# Altium PCB Farmbot_Rpi_ext.pcbdoc
Units mil, origin at the board's own origin, x right, y up, seen from the top; angles counter-clockwise.
Board outline 2654.45 x 2547.24 mil, 2 copper layers (Top Layer, Bottom Layer), stack 2.757 mil thick; 32 components, 33 nets, 133 pads, 0 vias.
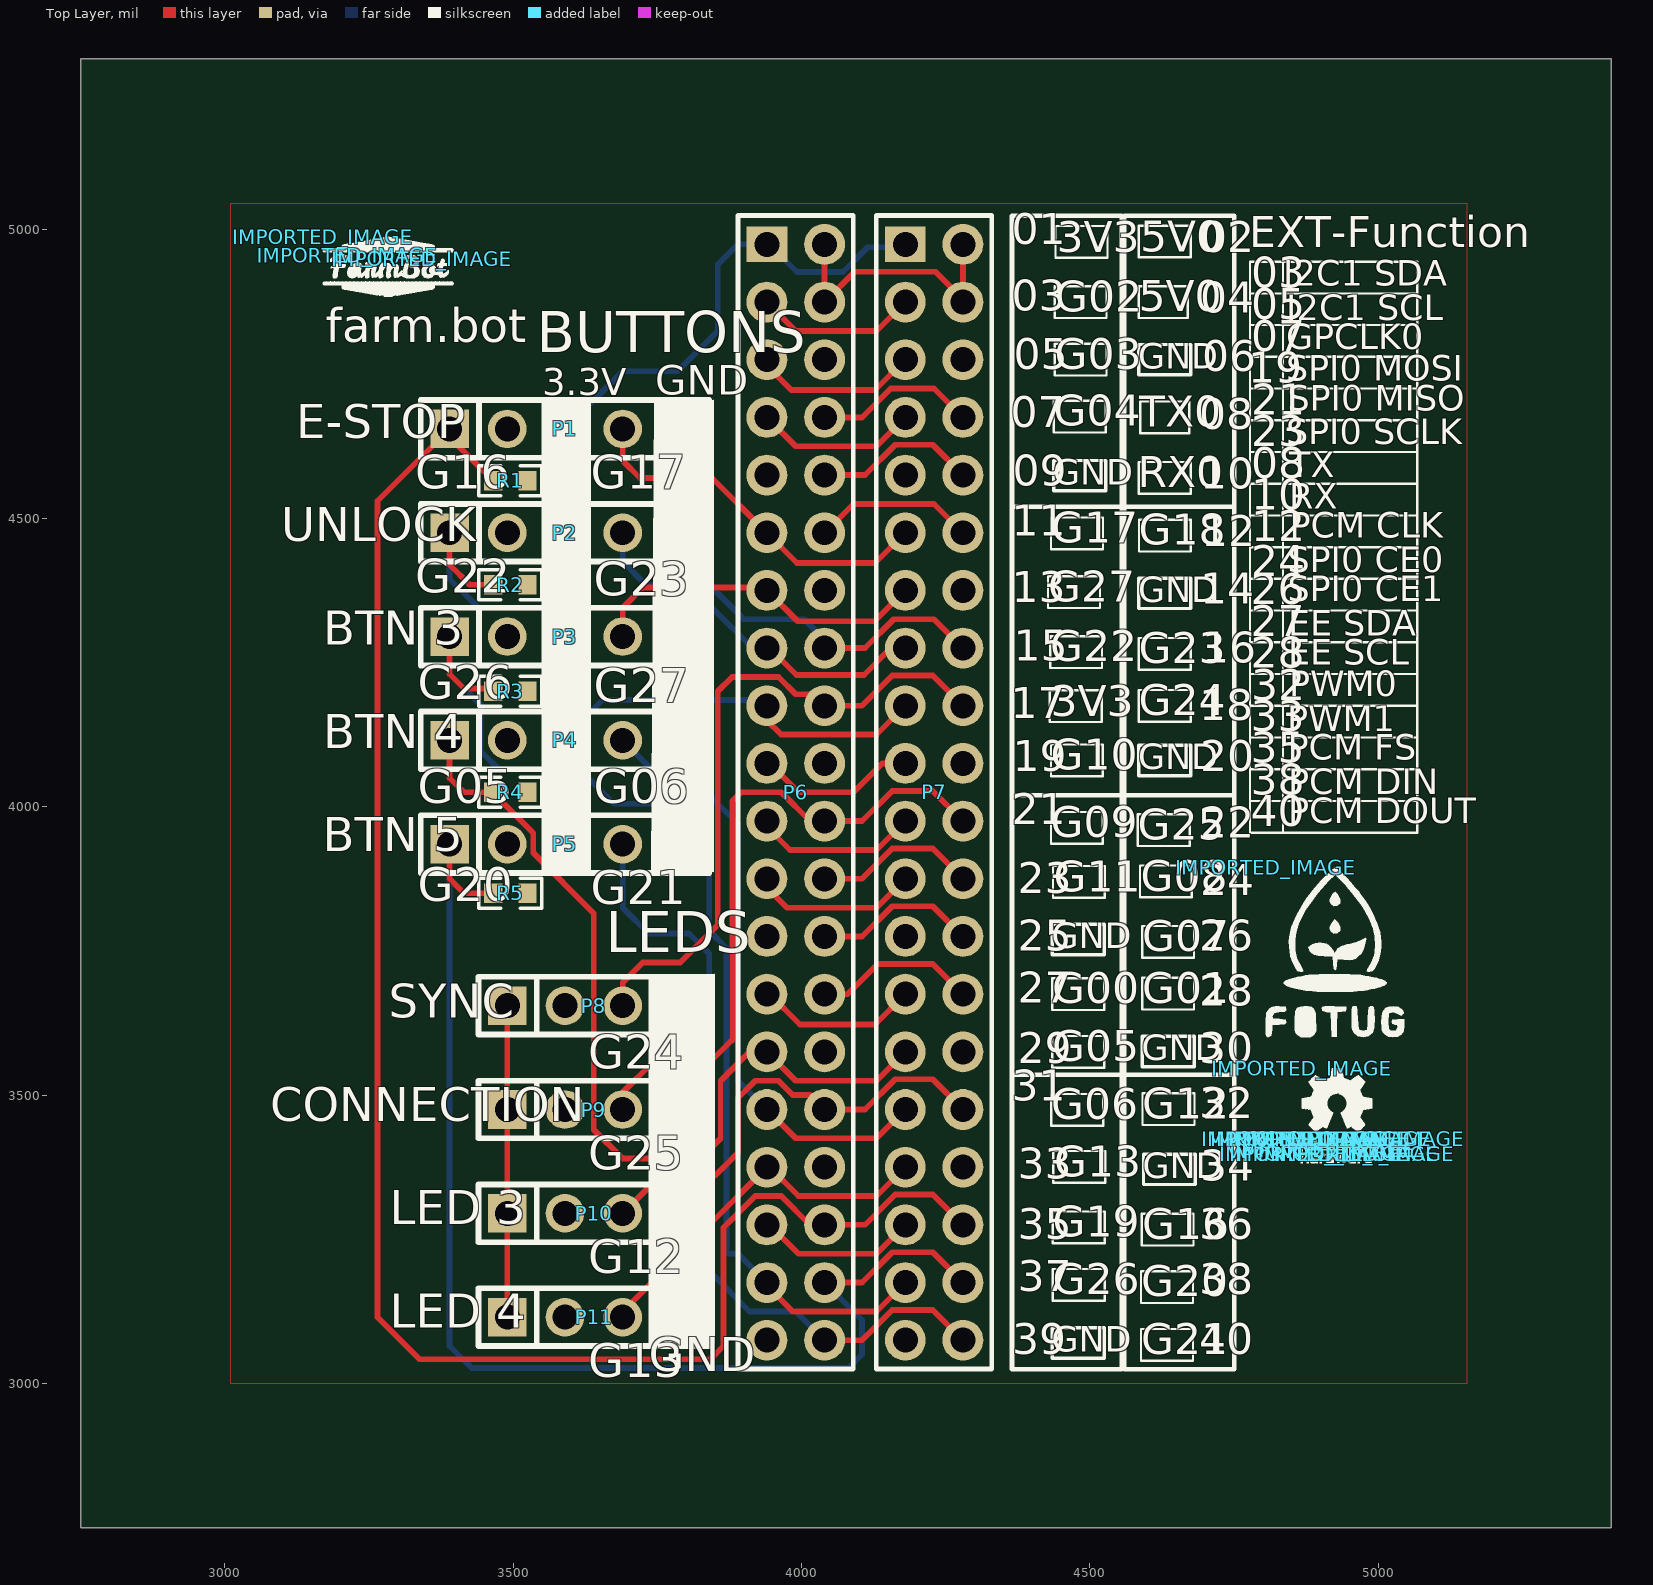
[diagram p0: Top Layer view]
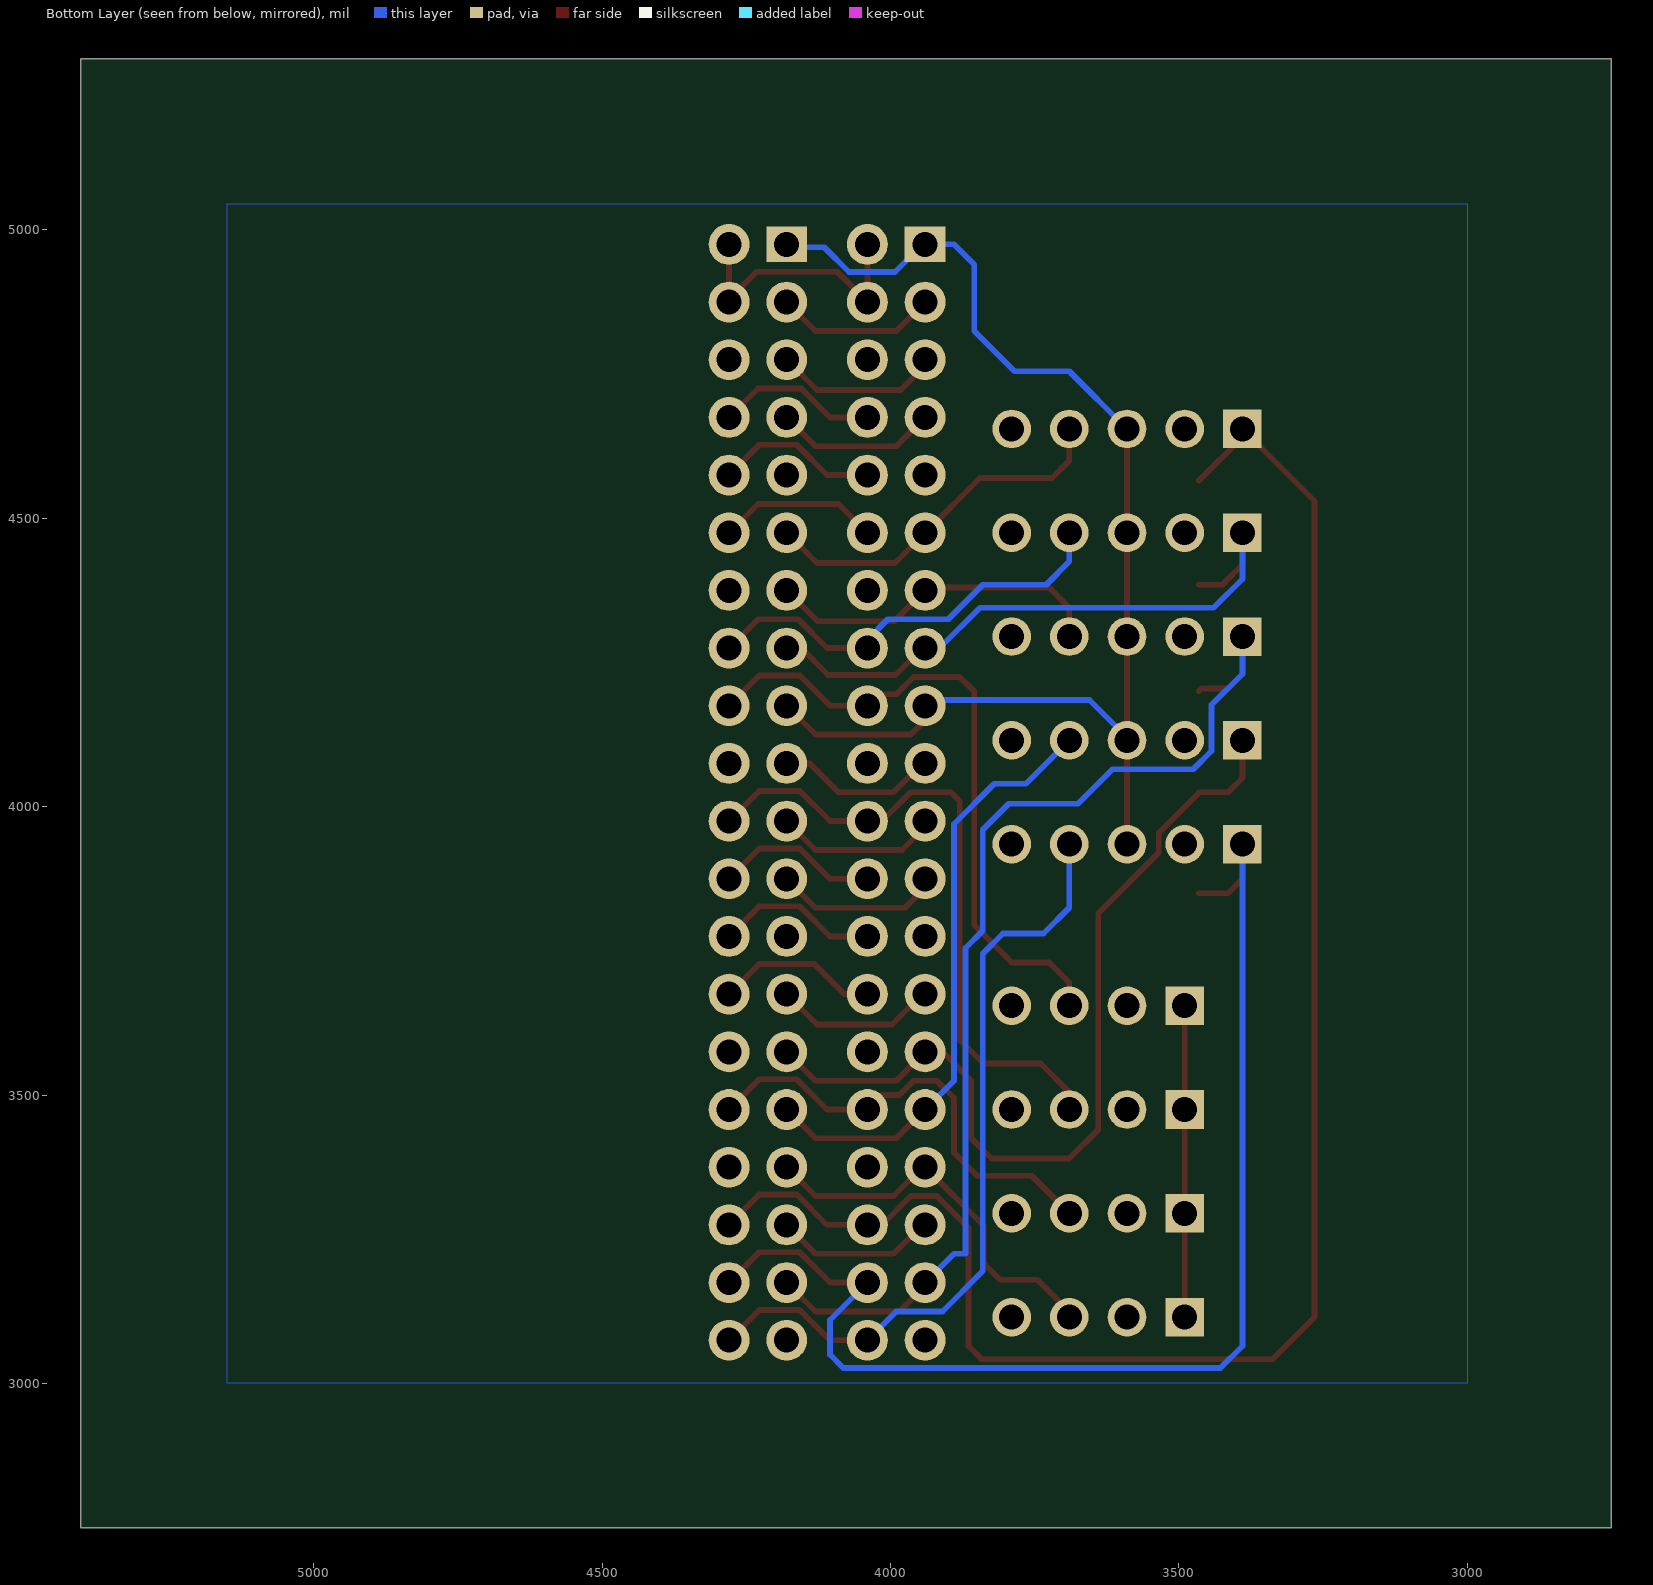
[diagram p1: Bottom Layer view, seen from below]

## Layer stack, top to bottom
Top Layer: signal copper 1.379
Bottom Layer: signal copper 1.378

## Board outline
5404.45,2750 2750,2750 2750,5297.24 5404.45,5297.24

## Components (designator, comment, footprint, x,y, rotation, side; value= is the part's Value field where it differs from the comment)
IMPORTED_IMAGE "IMPORTED_IMAGE" IMPORTED_IMAGE 3169.85,4987.86 r0 top
IMPORTED_IMAGE "IMPORTED_IMAGE" IMPORTED_IMAGE 4993.5,3424.31 r0 top
IMPORTED_IMAGE "IMPORTED_IMAGE" IMPORTED_IMAGE 4975.65,3398.58 r0 top
IMPORTED_IMAGE "IMPORTED_IMAGE" IMPORTED_IMAGE 4867.16,3546.49 r0 top
IMPORTED_IMAGE "IMPORTED_IMAGE" IMPORTED_IMAGE 4947.6,3398.58 r0 top
IMPORTED_IMAGE "IMPORTED_IMAGE" IMPORTED_IMAGE 4935.55,3424.31 r0 top
IMPORTED_IMAGE "IMPORTED_IMAGE" IMPORTED_IMAGE 4909.35,3404.84 r0 top
IMPORTED_IMAGE "IMPORTED_IMAGE" IMPORTED_IMAGE 3212.41,4956.26 r0 top
IMPORTED_IMAGE "IMPORTED_IMAGE" IMPORTED_IMAGE 3341.34,4949.94 r0 top
IMPORTED_IMAGE "IMPORTED_IMAGE" IMPORTED_IMAGE 4849.77,3424.31 r0 top
IMPORTED_IMAGE "IMPORTED_IMAGE" IMPORTED_IMAGE 4898.22,3398.58 r0 top
IMPORTED_IMAGE "IMPORTED_IMAGE" IMPORTED_IMAGE 4897.53,3424.31 r0 top
IMPORTED_IMAGE "IMPORTED_IMAGE" IMPORTED_IMAGE 4881.3,3424.31 r0 top
IMPORTED_IMAGE "IMPORTED_IMAGE" IMPORTED_IMAGE 4881.3,3398.58 r0 top
IMPORTED_IMAGE "IMPORTED_IMAGE" IMPORTED_IMAGE 4866,3424.31 r0 top
IMPORTED_IMAGE "IMPORTED_IMAGE" IMPORTED_IMAGE 4804.83,3895 r0 top
P1 "77311-462K05LF" HDR-TH_5P-P2.54-V-M 3590,4655 r0 top
P2 "77311-462K05LF" HDR-TH_5P-P2.54-V-M 3590,4475 r0 top
P3 "77311-462K05LF" HDR-TH_5P-P2.54-V-M 3590,4295 r0 top
P4 "77311-462K05LF" HDR-TH_5P-P2.54-V-M 3590,4115 r0 top
P5 "77311-462K05LF" HDR-TH_5P-P2.54-V-M 3590,3935 r0 top
P6 "2.54mm 2*20P直排针" HDR-TH_40P-P2.54-V-M-R2-C20-S2.54 3990,4025 r270 top
P7 "2.54mm 2*20P直排针" HDR-TH_40P-P2.54-V-M-R2-C20-S2.54 4230,4025 r270 top
P8 "HDR2.54-LI-2x4P" HDR-TH_4P-P2.54-V-M 3640,3655 r0 top
P9 "HDR2.54-LI-2x4P" HDR-TH_4P-P2.54-V-M 3640,3475 r0 top
P10 "HDR2.54-LI-2x4P" HDR-TH_4P-P2.54-V-M 3640,3295 r0 top
P11 "HDR2.54-LI-2x4P" HDR-TH_4P-P2.54-V-M 3640,3115 r0 top
R1 "10kΩ" R0603 3495.34,4565 r180 top
R2 "10kΩ" R0603 3495.34,4385 r180 top
R3 "10kΩ" R0603 3495.34,4200 r180 top
R4 "10kΩ" R0603 3495.34,4025 r180 top
R5 "10kΩ" R0603 3495.34,3850 r180 top

## Footprints (in the part's own frame and the unit in brackets; to place one, negate y for a bottom-side part, rotate by r counter-clockwise, add the part's x,y. Pads: shape width x height; smd on the part's side, far side on the other; paste and mask are expansions set on the pad)
HDR-TH_4P-P2.54-V-M [mm]
  rect 1.7x1.7 hole 1.1: 1(-3.81,0)
  round 1.7 hole 1.1: 2(-1.27,0) 3(1.27,0) 4(3.81,0)
  silkscreen extent -5.08,-1.27 5.08,1.27
HDR-TH_5P-P2.54-V-M [mm]
  rect 1.7x1.7 hole 1.1: 1(-5.08,0)
  round 1.7 hole 1.1: 2(-2.54,0) 3(0,0) 4(2.54,0) 5(5.08,0)
  silkscreen extent -6.35,-1.27 6.35,1.27
HDR-TH_40P-P2.54-V-M-R2-C20-S2.54 [mm]
  rect 1.575x1.8 hole 1.1: 1(-24.13,-1.27)
  round 1.8 hole 1.1: 2(-24.13,1.27) 3(-21.59,-1.27) 4(-21.59,1.27) 5(-19.05,-1.27) 6(-19.05,1.27) 7(-16.51,-1.27) 8(-16.51,1.27) 9(-13.97,-1.27) 10(-13.97,1.27) 11(-11.43,-1.27) 12(-11.43,1.27) 13(-8.89,-1.27) 14(-8.89,1.27) 15(-6.35,-1.27) 16(-6.35,1.27) 17(-3.81,-1.27) 18(-3.81,1.27) 19(-1.27,-1.27) 20(-1.27,1.27) 21(1.27,-1.27) 22(1.27,1.27) 23(3.81,-1.27) 24(3.81,1.27) 25(6.35,-1.27) 26(6.35,1.27) 27(8.89,-1.27) 28(8.89,1.27) 29(11.43,-1.27) 30(11.43,1.27) 31(13.97,-1.27) 32(13.97,1.27) 33(16.51,-1.27) 34(16.51,1.27) 35(19.05,-1.27) 36(19.05,1.27) 37(21.59,-1.27) 38(21.59,1.27) 39(24.13,-1.27) 40(24.13,1.27)
  silkscreen extent -25.4,-2.54 25.4,2.54
IMPORTED_IMAGE [mil]
  silkscreen extent 0,-27 227,0
R0603 [mil]
  rect 31.75x34.02 smd: 1(-29.66,0) 2(29.66,0)
  silkscreen extent -55,-26 55,26

## Free pads (board coordinates)
  round 24 smd far side: TP1(3790,4655) TP2(3590,4646.04)

## Nets (pads, with @x,y where several pads share a name; then routed paths per layer and width w, separated by ;. In a path a pad name is that pad's centre, name@x,y a point inside that pad or via, vN(x,y) a via of type N, cw(c..) or ccw(c..) an arc to the next point about the centre after c; other vN are vias at no path point)
2: P6.3 P7.3 | length 281.4
  Top Layer w10: P6.3 3990,4825 4130,4825 P7.3
3: P6.5 P7.5 | length 289.3
  Top Layer w10: P6.5 3940,4765 3982.43,4722.57 4127.57,4722.57 P7.5
3V3: P1.3 P2.3 P3.3 P4.3 P5.3 P6.1 P6.17 P7.1 P7.17 pad.TP2 | length 2231.8
  Top Layer w10: P5.3 P4.3 P3.3 P2.3 P1.3 ; P6.17 3940,4150 3965,4125 4130,4125 P7.17
  Bottom Layer w10: P4.3 3590,4120 3655,4185 3930,4185 P6.17 ; P1.3 3690,4755 3785,4755 3855,4825 3855,4940 3890,4975 P6.1 3944.43,4975 3992.43,4927 4072,4927 4115,4970 4175,4970 P7.1
4: P6.7 P7.7 | length 281.4
  Top Layer w10: P6.7 3990,4625 4130,4625 P7.7
5: P4.1 P6.29 P7.29 R4.2 | length 1545.6
  Top Layer w10: P4.1 3390,4050 3415,4025 R4.2 3465.68,4023.87 3535,3954.55 3535,3920 3640,3815 3640,3440 3690,3390 3825,3390 3860,3425 3860,3525 3910,3575 P6.29 3990,3525 4130,3525 P7.29
5V: P6.2 P6.4 P7.2 P7.4 | length 481.4
  Top Layer w10: P6.2 P6.4 4092.43,4927.43 4232.57,4927.43 P7.4@4280,4880 ; P7.4 P7.4@4280,4880 ; P7.2 P7.4@4280,4880
6: P4.4 P6.31 P7.31 | length 1057.2
  Top Layer w10: P6.31 3990,3425 4130,3425 P7.31
  Bottom Layer w10: P4.4 3765,4040 3820,4040 3890,3970 3890,3525 P6.31
7: P6.26 P7.26 | length 283.4
  Top Layer w10: P6.26 4105,3775 4157.43,3827.43 4227.57,3827.43 P7.26
8: P6.24 P7.24 | length 283.4
  Top Layer w10: P6.24 4105,3875 4157.43,3927.43 4227.57,3927.43 P7.24
9: P6.21 P7.21 | length 287.3
  Top Layer w10: P6.21 3940,3965 3980,3925 4130,3925 P7.21
10: P6.19 P7.19 | length 281.4
  Top Layer w10: P6.19 3945,4075 3995,4025 4090,4025 4140,4075 P7.19
11: P6.23 P7.23 | length 290.2
  Top Layer w10: P6.23 3940,3860 3975,3825 4130,3825 P7.23
12: P6.32 P7.32 P10.3 | length 805.1
  Top Layer w10: P10.3 3755,3360 3850,3360 3890,3400 3890,3495 3920,3525 3960,3525 3985,3500 4015,3500 P6.32 4110,3475 4162.43,3527.43 4227.57,3527.43 P7.32
13: P6.33 P7.33 P11.3 | length 683.1
  Top Layer w10: P11.3 3690,3125 3745,3180 3810,3180 3838.95,3208.95 3838.95,3273.95 P6.33 3945,3375 3995,3325 4130,3325 P7.33
14: P6.8 P7.8 | length 281.4
  Top Layer w10: P6.8 4105,4675 4155,4725 4230,4725 P7.8
15: P6.10 P7.10 | length 283.4
  Top Layer w10: P6.10 4110,4575 4162.43,4627.43 4227.57,4627.43 P7.10
16: P1.1 P6.36 P7.36 R1.2 | length 3059.8
  Top Layer w10: R1.2 3390,4640.68 P1.1 3265,4530 3265,3115 3337.98,3042.02 3842.02,3042.02 3865,3065 3865,3270 3920,3325 3965,3325 4015,3275 P6.36 4110,3275 4162.43,3327.43 4227.57,3327.43 P7.36
17: P1.4 P6.11 P7.11 | length 640.2
  Top Layer w10: P1.4 3690,4600 3720,4570 3845,4570 P6.11 3992.43,4422.57 4127.57,4422.57 P7.11
18: P6.12 P7.12 | length 281.4
  Top Layer w10: P6.12 4090,4525 4230,4525 P7.12
19: P6.35 P7.35 | length 281.4
  Top Layer w10: P6.35 3945,3275 3995,3225 4130,3225 P7.35
20: P5.1 P6.38 P7.38 R5.2 | length 2191.8
  Top Layer w10: P5.1 3390,3875 3415,3850 R5.2 ; P6.38 4105,3175 4157.43,3227.43 4227.57,3227.43 P7.38
  Bottom Layer w10: P5.1 3390,3065 3428.2,3026.8 4081.8,3026.8 4105,3050 4105,3110 P6.38
21: P5.4 P6.40 P7.40 | length 1376.3
  Top Layer w10: P6.40 4105,3075 4157.43,3127.43 4227.57,3127.43 P7.40
  Bottom Layer w10: P5.4 3690,3825 3735,3780 3805,3780 3840,3745 3840,3195 3910,3125 3990,3125 P6.40
22: P2.1 P6.15 P7.15 R2.2 | length 1103.3
  Top Layer w10: P2.1 3390,4420 3425,4385 R2.2 ; P6.15 3945,4275 3991.43,4228.57 4108.57,4228.57 4155,4275 P7.15
  Bottom Layer w10: P2.1 3390,4395 3440,4345 3845,4345 3915,4275 P6.15
23: P2.4 P6.16 P7.16 | length 752.3
  Top Layer w10: P6.16 4110,4275 4160,4325 4230,4325 P7.16
  Bottom Layer w10: P2.4 3690,4425 3730,4385 3840,4385 3900,4325 4005,4325 4040,4290 P6.16
24: P6.18 P7.18 P8.3 | length 1150.9
  Top Layer w10: P8.3 3690,3695 3725,3730 3790,3730 3855,3795 3855,4200 3880,4225 3960,4225 3990,4195 4020,4195 P6.18 4105,4175 4157.43,4227.43 4227.57,4227.43 P7.18
25: P6.22 P7.22 P9.3 | length 1142.8
  Top Layer w10: P9.3 3690,3505 3740,3555 3838.99,3555 3878.64,3594.64 3880,3594.64 3880,4010 3895,4025 3965,4025 4015,3975 P6.22 4105,3975 4157.43,4027.43 4227.57,4027.43 P7.22
26: P3.1 P6.37 P7.37 R3.2 | length 1949.3
  Top Layer w10: P3.1 3390,4230 3415,4205 3460.68,4205 R3.2 ; P6.37 3940,3170 3985,3125 4130,3125 P7.37
  Bottom Layer w10: P3.1 3390,4230 3443.36,4176.64 3443.36,4096.64 3475,4065 3615,4065 3675,4005 3795,4005 3840,3960 3840,3785 3870,3755 3870,3225 3890,3225 P6.37
27: P3.4 P6.13 P7.13 | length 600.9
  Top Layer w10: P3.4 3690,4345 3725,4380 3935,4380 P6.13 3993.57,4321.43 4126.43,4321.43 P7.13
GND: P1.5 P2.5 P3.5 P4.5 P5.5 P6.6 P6.9 P6.14 P6.20 P6.25 P6.30 P6.34 P6.39 P7.6 P7.9 P7.14 P7.20 P7.25 P7.30 P7.34 P7.39 P8.4 P9.4 P10.4 P11.4 pad.TP1 R1.1 R2.1 R3.1 R4.1 R5.1
ID_SC: P6.28 P7.28 | length 283.4
  Top Layer w10: P6.28 4080,3675 4132.43,3727.43 4227.57,3727.43 P7.28
ID_SD: P6.27 P7.27 | length 283.4
  Top Layer w10: P6.27 3945,3675 3997.43,3622.57 4127.57,3622.57 P7.27
NC: P8.1 P9.1 P10.1 P11.1 | length 540
  Top Layer w10: P11.1 P10.1 P9.1 P8.1
"": P1.2 P2.2 P3.2 P4.2 P5.2 P8.2 P9.2 P10.2 P11.2

## Polygon pours and split planes (outlines as drawn)
GND on Top Layer (solid, remove dead copper, pour order 0): 3010,3000 5154.45,3000 5154.45,5045 3010,5045
GND on Bottom Layer (solid, remove dead copper, pour order 1): 3000,3000 5150,3000 5150,5045 3000,5045

## Silkscreen, mask and mechanical layers (free items; w line width, h text height)
Top Silkscreen Layer:
  drawing of 300 lines, arcs and shapes, not listed
  text "01" at 4364.93,4974.87 h53.52
  text "EXT-Function" at 4776.26,4969.87 h53.52
  text "3V3" at 4442.5,4961.53 h53.52
  text "5V0" at 4587,4962.28 h53.52
  text "02" at 4691.62,4961.49 h53.52
  text "I2C1 SDA" at 4835.61,4903.23 h44.6
  text "03" at 4779.93,4899.87 h53.52
  text "03" at 4364.93,4859.87 h53.52
  text "5V0" at 4584.94,4858.87 h53.52
  text "G02" at 4440.06,4857.98 h53.52
  text "04" at 4691.62,4856.49 h53.52
  text "05" at 4779.93,4844.87 h53.52
  text "I2C1 SCL" at 4840.61,4843.23 h44.6
  text "farm.bot" at 3175,4805 h59.06
  text "GPCLK0" at 4840.38,4793.23 h44.6
  text "07" at 4779.93,4789.87 h53.52
  text "BUTTONS" at 3540.79,4788.07 h70.87
  text "GND" at 4584.09,4759.63 h44.6
  text "G03" at 4439.08,4758.87 h53.52
  text "05" at 4368.27,4758.18 h53.52
  text "06" at 4694.96,4754.8 h53.52
  text "SPI0 MOSI" at 4840.72,4738.23 h44.6
  text "19" at 4774.93,4734.87 h53.52
  text "3.3V" at 3550.17,4713.64 h46.83
  text "GND" at 3746.28,4714.46 h51.29
  text "SPI0 MISO" at 4842.72,4686.22 h44.6
  text "21" at 4779.93,4679.87 h53.52
  text "G04" at 4437.69,4660.12 h53.52
  text "TX0" at 4585.59,4658.87 h53.52
  text "07" at 4363.27,4658.18 h53.52
  text "08" at 4689.96,4654.8 h53.52
  text "E-STOP" at 3123.79,4639.23 h59.06
  text "SPI0 SCLK" at 4840.72,4628.23 h44.6
  text "23" at 4779.93,4624.87 h53.52
  text "TX" at 4845.69,4571.22 h44.6
  text "08" at 4779.93,4569.87 h53.52
  text "GND" at 4436.59,4558.5 h44.6
  text "09" at 4366.62,4556.49 h53.52
  text "RX0" at 4583.09,4553.87 h53.52
  text "G16" at 3330.07,4550.9 h59.06
  text "G17" at 3635.07,4550.9 h59.06
  text "10" at 4691.62,4551.49 h53.52
  text "RX" at 4845.69,4516.22 h44.6
  text "10" at 4779.93,4514.87 h53.52
  text "11" at 4364.93,4469.87 h53.52
  text "PCM CLK" at 4846.25,4466.22 h44.6
  text "UNLOCK" at 3098.19,4460.04 h59.06
  text "12" at 4779.93,4459.87 h53.52
  text "G17" at 4432.65,4457.62 h53.52
  text "G18" at 4585.15,4453.87 h53.52
  text "12" at 4693.41,4451.49 h53.52
  text "SPI0 CE0" at 4842.98,4406.22 h44.6
  text "24" at 4779.93,4399.87 h53.52
  text "G22" at 3330.07,4370.9 h59.06
  text "G23" at 3640.07,4365.9 h59.06
  text "G27" at 4427.65,4355.75 h53.52
  text "SPI0 CE1" at 4842.98,4356.22 h44.6
  text "13" at 4364.93,4354.87 h53.52
  text "GND" at 4584.09,4354.63 h44.6
  text "14" at 4691.62,4351.49 h53.52
  text "26" at 4778.59,4350.96 h53.52
  text "27" at 4778.59,4295.96 h53.52
  text "EE SDA" at 4843.89,4296.22 h44.6
  text "BTN 3" at 3170.53,4280.84 h59.06
  text "15" at 4368.27,4253.18 h53.52
  text "G22" at 4431.26,4252 h53.52
  text "16" at 4694.96,4249.8 h53.52
  text "G23" at 4584.79,4248.87 h53.52
  text "EE SCL" at 4843.89,4246.22 h44.6
  text "28" at 4778.59,4240.96 h53.52
  text "PWM0" at 4845.91,4191.22 h44.6
  text "G26" at 3335.07,4185.9 h59.06
  text "32" at 4779.93,4184.87 h53.52
  text "G27" at 3640.07,4180.9 h59.06
  text "G24" at 4585.18,4158.87 h53.52
  text "3V3" at 4432.5,4156.53 h53.52
  text "17" at 4363.27,4153.18 h53.52
  text "18" at 4689.96,4149.8 h53.52
  text "33" at 4778.59,4130.96 h53.52
  text "PWM1" at 4842.53,4131.22 h44.6
  text "BTN 4" at 3170.7,4100.98 h59.06
  text "PCM FS" at 4842.76,4081.22 h44.6
  text "35" at 4778.59,4075.96 h53.52
  text "GND" at 4584.09,4064.63 h44.6
  text "G10" at 4432.53,4064.18 h53.52
  text "19" at 4366.62,4061.49 h53.52
  text "20" at 4691.62,4061.49 h53.52
  text "38" at 4778.59,4020.96 h53.52
  text "PCM DIN" at 4844,4021.22 h44.6
  text "G05" at 3335.07,4005.9 h59.06
  text "G06" at 3640.07,4005.9 h59.06
  text "PCM DOUT" at 4844.11,3971.22 h44.6
  text "21" at 4364.93,3969.87 h53.52
  text "40" at 4778.59,3965.96 h53.52
  text "G09" at 4432.53,3947.31 h53.52
  text "22" at 4691.62,3946.49 h53.52
  text "G25" at 4583.24,3943.09 h53.52
  text "BTN 5" at 3170.26,3922.44 h59.06
  text "G08" at 4588.06,3853.73 h53.52
  text "G11" at 4437.34,3852.94 h53.52
  text "23" at 4374.93,3849.87 h53.52
  text "24" at 4691.09,3846.77 h53.52
  text "G20" at 3335.07,3835.9 h59.06
  text "G21" at 3635.07,3830.9 h59.06
  text "GND" at 4434.09,3754.63 h44.6
  text "25" at 4374.93,3749.87 h53.52
  text "G07" at 4590.74,3749.65 h53.52
  text "26" at 4689.93,3749.87 h53.52
  text "LEDS" at 3660.26,3748.07 h70.87
  text "27" at 4374.93,3659.87 h53.52
  text "G01" at 4590.74,3659.65 h53.52
  text "G00" at 4435.03,3658.87 h53.52
  text "28" at 4689.93,3654.87 h53.52
  text "SYNC" at 3284.73,3634.11 h59.06
  text "GND" at 4589.8,3560.41 h44.6
  text "G05" at 4435.03,3558.87 h53.52
  text "29" at 4374.93,3554.87 h53.52
  text "30" at 4689.93,3554.87 h53.52
  text "G24" at 3630.07,3545.9 h59.06
  text "31" at 4364.93,3489.87 h53.52
  text "32" at 4689.93,3459.87 h53.52
  text "G12" at 4591.29,3459.37 h53.52
  text "G06" at 4433.24,3458.09 h53.52
  text "CONNECTION" at 3079,3455 h59.06
  text "G25" at 3630.07,3370.9 h59.06
  text "G13" at 4438.06,3358.73 h53.52
  text "GND" at 4592.13,3355.91 h44.6
  text "33" at 4374.93,3354.87 h53.52
  text "34" at 4691.09,3351.77 h53.52
  text "LED 3" at 3286.43,3275.98 h59.06
  text "G19" at 4435.74,3254.65 h53.52
  text "35" at 4374.93,3249.87 h53.52
  text "G16" at 4591.1,3250.01 h53.52
  text "36" at 4689.93,3249.87 h53.52
  text "G12" at 3630.07,3190.9 h59.06
  text "37" at 4374.93,3159.87 h53.52
  text "G26" at 4435.74,3154.65 h53.52
  text "38" at 4689.93,3154.87 h53.52
  text "G20" at 4588.79,3150.93 h53.52
  text "LED 4" at 3286.59,3096.26 h59.06
  text "GND" at 4434.09,3054.63 h44.6
  text "G21" at 4588.79,3050.93 h53.52
  text "39" at 4365.08,3050.39 h53.52
  text "40" at 4690.08,3050.39 h53.52
  text "GND" at 3735.07,3020.9 h59.06
  text "G13" at 3630.07,3010.9 h59.06
Mechanical 1:
  lines w10 net "": 3035,3000 5109.8,3000 5109.8,5047.24 3035,5047.24 3035,3000